# Altium PCB Slave_brd.PcbDoc
Units mil, origin at the board's own origin, x right, y up, seen from the top; angles counter-clockwise.
Board outline 6000 x 4000 mil, 2 copper layers (Top Layer, Bottom Layer); 83 components, 64 nets, 280 pads, 0 vias.
Unrouted connection lines stored in the file: 183.
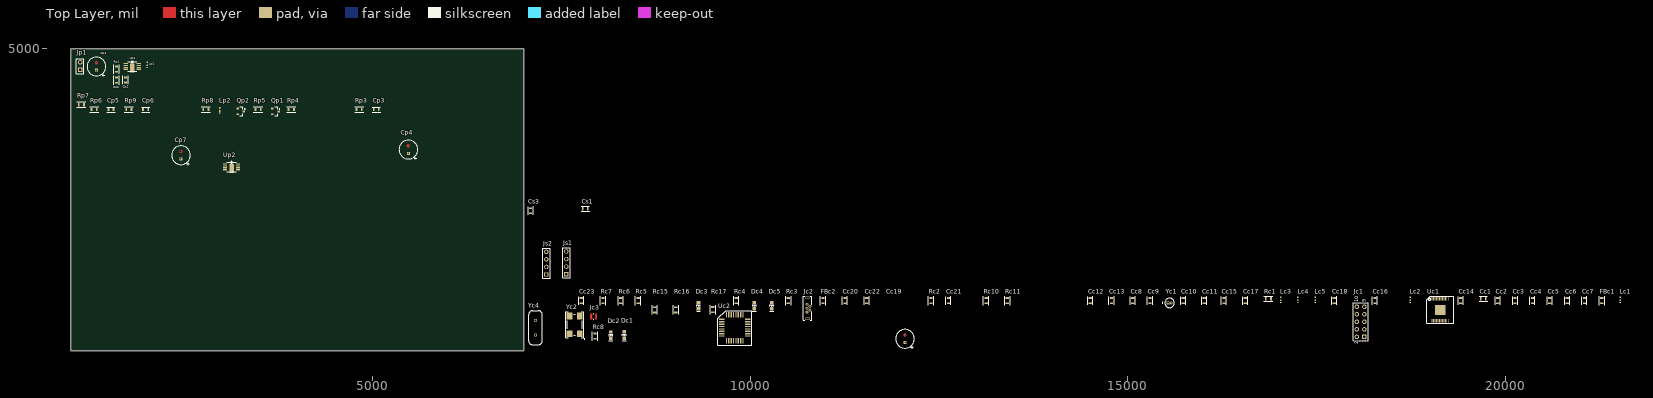
[diagram p0: Top Layer view]
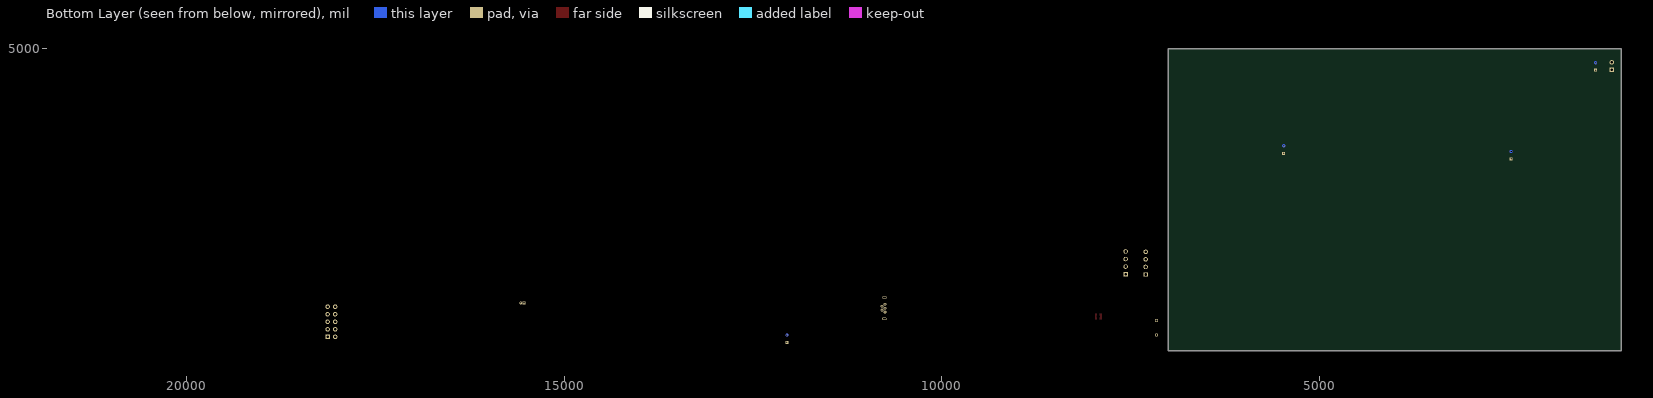
[diagram p1: Bottom Layer view, seen from below]

## Layer stack, top to bottom
Top Solder: solder mask 0.4, Solder Resist, Dk 3.5
Top Layer: signal copper 1.4
Dielectric 1: dielectric 12.6, FR-4, Dk 4.8
Bottom Layer: signal copper 1.4
Bottom Solder: solder mask 0.4, Solder Resist, Dk 3.5

## Board outline
1000,1000 7000,1000 7000,5000 1000,5000
cut-out: 1030,5010

## Design rules (kind name [scope] priority, off if disabled: settings)
Clearance [All] p1: gap=10 ignorepadtopadclearanceinfootprint=FALSE except(0: Arc-Hole Track-Hole SMDPad-Hole THPad-Hole Via-Hole Fill-Hole Poly-Hole Region-Hole Text-Hole)
PolygonConnect [All] p1: connectstyle=Relief reliefconductorwidth=10 reliefentries=4 polygonreliefangle="90 Angle" airgapwidth=10
RoomDefinition Sns [InComponentClass('Sns')] p1: confinementstyle=ConfineIn formatcopy=TRUE lockcomponents=FALSE outline 7045,2745 9510,2745 9510,3025 7045,3025
RoomDefinition Pwr [InComponentClass('Pwr')] p2: confinementstyle=ConfineIn formatcopy=TRUE lockcomponents=FALSE outline 1006.54,3284.69 3346.54,3284.69 3346.54,5000 1006.54,5000
RoomDefinition Controls [InComponentClass('Controls')] p3: confinementstyle=ConfineIn formatcopy=TRUE lockcomponents=FALSE outline 7045,1048.66 21675,1048.66 21675,1833.66 7045,1833.66
RoutingVias [All] p1: holewidth=28 width=50 viastyle="Through Hole" minholewidth=28 minwidth=50 maxholewidth=28 maxwidth=50
SolderMaskExpansion [All] p1: expansion=4
Width [All] p1: maxlimit=10 minlimit=10 preferedwidth=10
30 further rules are at their usual default settings.

## Classes and differential pairs
component class Sns: Cs1 Cs3 Js1 Js2 Us1 Us2 Us3 Us4
component class Pwr: Cp1 Cp2 Cp3 Cp4 Cp5 Cp6 Cp7 Jp1 Lp1 Lp2 Qp1 Qp2 Rp1 Rp2 Rp3 Rp4 Rp5 Rp6 Rp7 Rp8 Rp9 Up1 Up2
component class Controls: Cc1 Cc2 Cc3 Cc4 Cc5 Cc6 Cc7 Cc8 Cc9 Cc10 Cc11 Cc12 Cc13 Cc14 Cc15 Cc16 Cc17 Cc18 Cc19 Cc20 Cc21 Cc22 Cc23 Dc1 Dc2 Dc3 Dc4 Dc5 FBc1 FBc2 Jc1 Jc2 Jc3 Lc1 Lc2 Lc3 Lc4 Lc5 Rc1 Rc2 Rc3 Rc4 Rc5 Rc6 Rc7 Rc8 Rc10 Rc11 Rc15 Rc16 Rc17 Uc1 Uc2 Yc1 Yc2 Yc4

## Components (designator, comment, footprint, x,y, rotation, side; value= is the part's Value field where it differs from the comment)
Cc1 "Cap" c0603 19710,1688.66 r0 top value=DNM
Cc2 "Cap" c0603 19900,1663.66 r90 top value=100nF
Cc3 "Cap" c0603 20130,1663.66 r90 top value=100nF
Cc4 "Cap" c0603 20360,1663.66 r90 top value=100nF
Cc5 "Cap" c0603 20590,1663.66 r90 top value=10uF
Cc6 "Cap" c0603 20820,1663.66 r90 top value=100nF
Cc7 "Cap" c0603 21050,1663.66 r90 top value=100nF
Cc8 "Cap" c0603 15065,1663.66 r90 top value=100nF
Cc9 "Cap" c0603 15295,1663.66 r90 top value=27pF
Cc10 "Cap" c0603 15735,1663.66 r90 top value=27pF
Cc11 "Cap" c0603 16015,1663.66 r90 top value=1uF
Cc12 "Cap" c0603 14505,1663.66 r90 top value=DNM
Cc13 "Cap" c0603 14785,1663.66 r90 top value=DNM
Cc14 "Cap" c0603 19410,1663.66 r90 top value=6p8F
Cc15 "Cap" c0603 16275,1663.66 r90 top value=1pF
Cc16 "Cap" c0603 18275,1663.66 r90 top value=1pF
Cc17 "Cap" c0603 16555,1663.66 r90 top value=1pF
Cc18 "Cap" c0603 17735,1663.66 r90 top value=12pF
Cc19 "Cap" CAP_EL__TH_rad_r3_15h11_2 12050,1158.66 r90 top value=47uF
Cc20 "Cap" c0603 11255,1663.66 r90 top value=100nF
Cc21 "Cap" c0603 12625,1663.66 r90 top value=27pF
Cc22 "Cap" c0603 11545,1663.66 r90 top value=27pF
Cc23 "Cap" c0603 7760,1663.66 r90 top value=33nF
Cp1 "Cap Pol1" CAP_EL__TH_rad_r3_15h11_2 1340,4765 r90 top value=47uF
Cp2 "Cap" c0603 1725,4586.54 r270 top value=100nF
Cp3 "Cap" c0603 5046.54,4195 r0 top value=100nF
Cp4 "Cap Pol1" CAP_EL__TH_rad_r3_15h11_2 5471.54,3665 r90 top value=47uF
Cp5 "Cap" c0603 1531.54,4195 r0 top value=100nF
Cp6 "Cap" c0603 1991.54,4195 r0 top value=100nF
Cp7 "Cap Pol1" CAP_EL__TH_rad_r3_15h11_2 2460,3590 r90 top value=47uF
Cs1 "Cap" c0603 7815,2880 r0 top value=100nF
Cs3 "Cap" c0603 7090,2855 r90 top value=100nF
Dc1 "LED0" LED_0805 8330,1208.66 r90 top
Dc2 "LED0" LED_0805 8155,1207.32 r90 top
Dc3 "LED0" LED_0805 9315,1598.66 r90 top
Dc4 "LED0" LED_0805 10055,1598.66 r90 top
Dc5 "LED0" LED_0805 10285,1598.66 r90 top
FBc1 "BLM18HE152SN1" r0603 21280,1663.66 r90 top
FBc2 "BLM18HE152SN1" r0603 10965,1663.66 r90 top
Jc1 "Header 5X2" HDR2X5 18135,1183.66 r90 top
Jc2 "614105150721" 614105150721 10760,1563.66 r90 top
Jc3 "MM5829-2700RJ4" ANT_MM5829-2700RJ4 7925,1453.66 r0 top
Jp1 "Battery" HDR1X2 1125,4720 r90 top
Js1 "101020088" HDR1X4 7565,2015 r90 top
Js2 "SPX-15074" HDR1X4 7300,2010 r90 top
Lc1 "Inductor" 0402-A 21525,1688.66 r90 top value=10uH
Lc2 "Inductor" 0402-A 18740,1688.66 r90 top value=2n4H
Lc3 "Inductor" 0402-A 17025,1688.66 r90 top value=2n4H
Lc4 "Inductor" 0402-A 17255,1688.66 r90 top value=2nH
Lc5 "Inductor" 0402-A 17485,1688.66 r90 top value=2nH
Lp1 "Inductor" 0402-A 2010,4800.31 r90 top value=22uH
Lp2 "Inductor" 0402-A 2971.54,4195 r90 top value=22uH
Qp1 "MOSFET-P" SOT23_L 3711.54,4170 r0 top
Qp2 "MOSFET-N" SOT23_L 3251.54,4170 r0 top
Rc1 "Res1" r0603 16865,1688.66 r0 top value=100K
Rc2 "Res1" r0603 12395,1663.66 r90 top value=470
Rc3 "Res1" r0603 10505,1663.66 r90 top value=27
Rc4 "Res1" r0603 9815,1663.66 r90 top value=27
Rc5 "Res1" r0603 8515,1663.66 r90 top value=4K7
Rc6 "Res1" r0603 8285,1663.66 r90 top value=10K
Rc7 "Res1" r0603 8050,1663.66 r90 top value=1K5
Rc8 "Res1" r0603 7945,1193.66 r90 top value=2K2
Rc10 "Res1" r0603 13125,1663.66 r90 top value=10K
Rc11 "Res1" r0603 13405,1663.66 r90 top value=10K
Rc15 "Res1" r0603 8735,1543.66 r90 top value=2K2
Rc16 "Res1" r0603 9015,1543.66 r90 top value=2K2
Rc17 "Res1" r0603 9505,1545 r90 top value=2K2
Rp1 "Res1" r0603 1605,4731.54 r90 top value=53K6
Rp2 "Res1" r0603 1605,4586.54 r90 top value=100K
Rp3 "Res1" r0603 4821.54,4195 r0 top value=100K
Rp4 "Res1" r0603 3921.54,4195 r0 top value=100K
Rp5 "Res1" r0603 3481.54,4195 r0 top value=1K
Rp6 "Res1" r0603 1311.54,4195 r0 top value=53K6
Rp7 "Res1" r0603 1142.36,4259.69 r0 top value=100K
Rp8 "Res1" r0603 2791.54,4195 r0 top value=100K
Rp9 "Res1" r0603 1771.54,4195 r0 top value=100K
Uc1 "CC2650F128RGZ" VQFN-48(RGZ) 19005,1648.66 r0 top
Uc2 "FT232BL-REEL" LQFP-32 9794.88,1305 r0 top
Up1 "MAX1674/5" MSOP-8_TermalPad 1815,4765 r0 top
Up2 "MAX1674/5" MSOP-8_TermalPad 3130,3435 r0 top
Yc1 "32.768 kHz" XTAL_AB38T-32.768KHZ_TH_vertical 15555,1633.66 r0 top
Yc2 "ECS-240-18-20BQ-DS" XTAL_7x5_4pads 7675,1343.66 r90 top
Yc4 "ABL-6.000MHZ-B2" XTAL_TH_2pad_HC49/US 7155,1305 r90 top

## Footprints (in the part's own frame and the unit in brackets; to place one, negate y for a bottom-side part, rotate by r counter-clockwise, add the part's x,y. Pads: shape width x height; smd on the part's side, far side on the other; paste and mask are expansions set on the pad)
0402-A [mm] "Chip Inductor, Body 1.0x0.5mm, IPC High Density"
  rect 0.6x0.5 smd: 1(-0.5,0) 2(0.5,0)
  silkscreen extent -1.1,-0.15 -1.1,0.15, body extent -0.55,-0.3 0.55,0.3, height 0.55
614105150721 [mm] "Micro USB 2.0 Type B Vertical 5 Contacts"
  round 0.94 hole 0.44: 1(-1.3,0.22) 2(-0.65,-0.78) 3(0,0.22) 4(0.65,-0.78) 5(1.3,0.22)
  oval 0.85x1.5 hole 0.35 slot 1 at 90 deg: Shell(-3.575,0) Shell(3.575,0)
  silkscreen extent -4,-1.4 4,1.5, body extent -4,-1.4 4,1.5, height 5.64
ANT_MM5829-2700RJ4 [mm]
  rect 0.4x0.5 smd: 1(0,-0.95) 3(0,0.95)
  rect 0.1x0.1 smd: 2(0.775,0) 4(-0.775,0)
  Top Layer region: -0.5,0.5 -0.5,0.85 -1.1,0.85 -1.1,-0.85 -0.5,-0.85 -0.5,-0.5 -0.7,-0.15 -0.7,0.15
  Top Layer region: 0.5,-0.5 0.5,-0.85 1.1,-0.85 1.1,0.85 0.5,0.85 0.5,0.5 0.7,0.15 0.7,-0.15
  body extent -0.9,-1 0.9,1, height 0.5
c0603 [mm] "Capacitor 0603"
  rect 0.6x1.1 smd: 1(-0.85,0) 2(0.85,0)
  silkscreen extent -1.37,-0.84 1.43,0.84, body extent -0.8,-0.4 0.91,0.4, height 0.8
CAP_EL__TH_rad_r3_15h11_2 [mm] "Condensatori elettrolitici in alluminio, Foro passante, r 3.15mm h 11.2mm"
  rect 1.008x1.008 hole 0.5: 1(-1.25,0)
  round 0.5 hole 0.5: 2(1.25,0)
  Top Layer region: 1.724,0.172 1.463,0.457 1.078,0.474 0.793,0.213 0.776,-0.172 1.037,-0.457 1.422,-0.474 1.707,-0.213
  Bottom Layer region: 1.724,0.172 1.463,0.457 1.078,0.474 0.793,0.213 0.776,-0.172 1.037,-0.457 1.422,-0.474 1.707,-0.213
  Multi-Layer region: 1.724,0.172 1.463,0.457 1.078,0.474 0.793,0.213 0.776,-0.172 1.037,-0.457 1.422,-0.474 1.707,-0.213
  silkscreen extent -3.3,-3.15 3.15,3.15, body extent -3.16,-3.22 3.17,3.14, height 11.21
HDR1X2 [mm] "Connector; Header; 2 Position"
  rect 1.5x1.5 hole 0.9: 1(0,0)
  round 1.5 hole 0.9: 2(2.54,0)
  silkscreen extent -1.27,-1.27 3.81,1.27
HDR1X4 [mm] "Connector; Header; 4 Position"
  rect 1.5x1.5 hole 0.9: 1(0,0)
  round 1.5 hole 0.9: 2(2.54,0) 3(5.08,0) 4(7.62,0)
  silkscreen extent -1.27,-1.27 8.89,1.27
HDR2X5 [mm] "Connector; Header; 5x2 Position"
  rect 1.5x1.5 hole 0.9: 1(0,0)
  round 1.5 hole 0.9: 2(0,2.54) 3(2.54,0) 4(2.54,2.54) 5(5.08,0) 6(5.08,2.54) 7(7.62,0) 8(7.62,2.54) 9(10.16,0) 10(10.16,2.54)
  silkscreen extent -1.27,-1.27 11.43,3.81
LED_0805 [mm] "Diode Led 0803"
  rect 1.1x1.2 smd: 1(-1.05,0) 2(1.05,0)
  silkscreen extent -1.9,-0.66 0.32,0.68, body extent -1,-0.62 1,0.63, height 0.64
LQFP-32 [mil] "LQFP-32, no central pad, easy solderable"
  rect 73.74x18 smd: 1(-169.88,110) 2(-169.88,79) 3(-169.88,47) 4(-169.88,16) 5(-169.88,-16) 6(-169.88,-47) 7(-169.88,-79) 8(-169.88,-110) 17(169.88,-110) 18(169.88,-79) 19(169.88,-47) 20(169.88,-16) 21(169.88,16) 22(169.88,47) 23(169.88,79) 24(169.88,110)
  rect 18x73.74 smd: 9(-110,-169.88) 10(-79,-169.88) 11(-47,-169.88) 12(-16,-169.88) 13(16,-169.88) 14(47,-169.88) 15(79,-169.88) 16(110,-169.88) 25(110,169.88) 26(79,169.88) 27(47,169.88) 28(16,169.88) 29(-16,169.88) 30(-47,169.88) 31(-79,169.88) 32(-110,169.88)
  silkscreen extent -224,-231 224,224, body extent -177,-177 177,177, height 64
MSOP-8_TermalPad [mil]
  rect 56x17 smd: 1(-86,38.58) 2(-86,13) 3(-86,-12.5) 4(-86,-38) 5(86,-38) 6(86,-12.5) 7(86,13) 8(86,38.58)
  rect 59.06x118.11 smd: ""(0,-19.69)
  silkscreen extent -61,-61 61,73, body extent -98,-61 97,61, height 43
r0603 [mm] "Resistor 0603"
  rect 0.6x1.1 smd: 1(-0.91,0) 2(0.85,0)
  silkscreen extent -1.56,-0.91 1.5,0.91, body extent -0.8,-0.4 0.8,0.4, height 0.45
SOT23_L [mm] "SOT23, 3-Leads, Body 2.9x1.3mm, Pitch 0.95mm, Lead Span 2.3mm - Reverse Pinning, IPC High Density"
  rect 0.85x0.6 smd: 1(1.075,0) 2(-1.075,-0.95) 3(-1.075,0.95)
  silkscreen extent -0.3,-1.5 1.48,1.5, body extent -0.7,-1.5 0.7,1.5, height 1.1
VQFN-48(RGZ) [mm]
  rect 1.2x0.15 smd: 1(-0.3,0) 2(-0.3,-0.5) 3(-0.3,-1) 4(-0.3,-1.5) 5(-0.3,-2) 6(-0.3,-2.5) 7(-0.3,-3) 8(-0.3,-3.5) 9(-0.3,-4) 10(-0.3,-4.5) 11(-0.3,-5) 12(-0.3,-5.5) 25(7.1,-5.5) 26(7.1,-5) 27(7.1,-4.5) 28(7.1,-4) 29(7.1,-3.5) 30(7.1,-3) 31(7.1,-2.5) 32(7.1,-2) 33(7.1,-1.5) 34(7.1,-1) 35(7.1,-0.5) 36(7.1,0)
  rect 0.15x1.2 smd: 13(0.65,-6.45) 14(1.15,-6.45) 15(1.65,-6.45) 16(2.15,-6.45) 17(2.65,-6.45) 18(3.15,-6.45) 19(3.65,-6.45) 20(4.15,-6.45) 21(4.65,-6.45) 22(5.15,-6.45) 23(5.65,-6.45) 24(6.15,-6.45) 37(6.15,0.95) 38(5.65,0.95) 39(5.15,0.95) 40(4.65,0.95) 41(4.15,0.95) 42(3.65,0.95) 43(3.15,0.95) 44(2.65,0.95) 45(2.15,0.95) 46(1.65,0.95) 47(1.15,0.95) 48(0.65,0.95)
  rect 3.5x3.5 smd: 49(3.4,-2.75)
  silkscreen extent -1.17,-7.28 8,1.89, body extent -0.12,-6.23 6.88,0.77, height 1
XTAL_7x5_4pads [mm] "The CSM-8M is a miniature SMD Crystal with a 7.0 x 5.0 mm footprint."
  rect 2.3x2 smd: 1(-3,-1.7) 2(3,-1.7) 3(3,1.7) 4(-3,1.7)
  silkscreen extent -4.94,-3.46 4.36,2.96, body extent -3.5,-2.48 3.5,2.52, height 1.51
XTAL_AB38T-32.768KHZ_TH_vertical [mm] "CRYSTAL TH vertical  32.7680KHZ 12.5PF"
  rect 0.925x0.925 hole 0.55: 1(-0.55,0)
  round 0.925 hole 0.55: 2(0.55,0)
  silkscreen extent -2.54,-1.6 1.6,1.6, body extent -1.74,-1.6 1.71,1.6, height 8.27
XTAL_TH_2pad_HC49/US [mm] "Crystal 11,50 x 5,00mm TH 2 pads,"
  round 1.03 hole 0.63: 1(-2.44,0) 2(2.44,0)
  silkscreen extent -5.68,-2.33 5.68,2.33, body extent -5.74,-2.5 5.76,2.5, height 3.5

## Part data
Cc1 Cc2 Cc3 Cc4 Cc5 Cc6 Cc7 Cc8 Cc9 Cc10 Cc11 Cc12 Cc13 Cc14 Cc15 Cc16 Cc17 Cc18 Cc19 Cc20 Cc21 Cc22 Cc23 Cp2 Cp3 Cp5 Cp6 Cs1 Cs3: "Capacitor", LatestRevisionDate=17-Jul-2002, LatestRevisionNote="Re-released for DXP Platform.", PackageDescription="Radial Cap, Thru-Hole; 2 Leads; 0.3 in Pin Spacing", PackageReference=RAD-0.3, Published=8-Jun-2000, Publisher="Altium Limited"
Cp1 Cp4 Cp7: "Polarized Capacitor (Radial)", LatestRevisionDate=17-Jul-2002, LatestRevisionNote="Re-released for DXP Platform.", PackageDescription="Polarized Capacitor (Radial); 2 Leads", PackageReference=RB7.6-15, Published=8-Jun-2000, Publisher="Altium Limited"
Dc1 Dc2 Dc3 Dc4 Dc5: "Typical INFRARED GaAs LED", LatestRevisionDate=08-Jul-2005, LatestRevisionNote="Mech Layer 1 removed.", PackageDescription="LED; 2 Leads", PackageReference=LED-0, Published=8-Jun-2000, Publisher="Altium Limited"
FBc1 FBc2: library part "Fuse 1", "Fuse", LatestRevisionDate=17-Jul-2002, LatestRevisionNote="Re-released for DXP Platform.", PackageDescription="Thru-Hole; 2 Leads", PackageReference=PIN-W2/E2.8, Published=8-Jun-2000, Publisher="Altium Limited"
Jc1: "Header, 5-Pin, Dual row", LatestRevisionDate=17-Jul-2002, LatestRevisionNote="Re-released for DXP Platform.", Publisher="Altium Limited"
Jc2: "Micro USB 2.0 Type B Receptacle WR-COM, Vertical, THT", Contact Resistance="30 mOhm", Operating Temperature="-40 to 85 degC", Rated Current="1.8 A", Working Voltage="30 VAC", ComponentLink1Description=Manufacturer, ComponentLink1URL=http://www.we-online.de, ComponentLink2Description=Datasheet, ComponentLink2URL=https://katalog.we-online.de/em/datasheet/614105150721.pdf, Connector Type="Micro USB 2.0 Type B", Gender=Receptacle, Mounting Technology=THT, Orientation=Vertical, Packaging="Tape and Reel", Part Number=614105150721, Published Date="September 2018", Publisher="Wurth Elektronik"
Jc3: "Conn Coaxial RCP 0Hz to 12GHz 50Ohm Solder ST SMD Gold", Package=None, Digi-Key_Part_Number=490-5894-1-ND, Digi-Key_Purchase_URL=https://www.digikey.it/product-detail/en/murata-electronics-north-america/MM5829-2700RJ4/490-5894-1-ND/3528184?utm_source=snapeda&utm_medium=aggregator&utm_campaign=symbol, MF=Murata, MP=MM5829-2700RJ4, SnapEDA_Link=https://www.snapeda.com/parts/MM5829-2700RJ4/Murata%20Electronics%20North%20America/view-part/?ref=snap
Jp1: library part "Header 2", "Header, 2-Pin", LatestRevisionDate=17-Jul-2002, LatestRevisionNote="Re-released for DXP Platform.", Publisher="Altium Limited"
Js1: library part "Header 4", "Header, 4-Pin", LatestRevisionDate=17-Jul-2002, LatestRevisionNote="Re-released for DXP Platform.", Publisher="Altium Limited"
Js2: library part SHTC3, "Humidity and Temperature Sensor IC: - Ultra-low power consumption / - Full battery supply voltage range (1.62 - 3.6 V) / - Small DFN package: 2 × 2 × 0.75 mm3 / - Typical accuracy: ±2 %RH and ±0.2 °C / - Fully calibrated and reflow solderable / - Power-up and measurement within 1 ms", ComponentLink1Description=datasheet, ComponentLink1URL=https://www.sensirion.com/fileadmin/user_upload/customers/sensirion/Dokumente/0_Datasheets/Humidity/Sensirion_Humidity_Sensors_SHTC3_Datasheet.pdf
Qp1: "P-Channel MOSFET", LatestRevisionDate=17-Jul-2002, LatestRevisionNote="Re-released for DXP Platform.", PackageDescription="TO, Flat Index; 3 In-Line, Axial Leads; Body Dia. 4.6mm; Lead Dia. 0.5 mm (max)", PackageReference=E3, PackageVersion=1995/1996, Published=8-Jun-2000, Publisher="Altium Limited"
Qp2: "N-Channel MOSFET", LatestRevisionDate=17-Jul-2002, LatestRevisionNote="Re-released for DXP Platform.", PackageDescription="TO, Flat Index; 3 In-Line, Axial Leads; Body Dia. 4.6mm; Lead Dia. 0.5 mm (max)", PackageReference=E3, PackageVersion=1995/1996, Published=8-Jun-2000, Publisher="Altium Limited"
Rc1 Rc2 Rc3 Rc4 Rc5 Rc6 Rc7 Rc8 Rc10 Rc11 Rc15 Rc16 Rc17 Rp1 Rp2 Rp3 Rp4 Rp5 Rp6 Rp7 Rp8 Rp9: "Resistor", LatestRevisionDate=17-Jul-2002, LatestRevisionNote="Re-released for DXP Platform.", PackageDescription="Axial Device, Thru-Hole; 2 Leads; 0.3 in Pin Spacing", PackageReference=AXIAL-0.3, Published=8-Jun-2000, Publisher="Altium Limited"
Uc1: "The CC2650 device is a wireless MCU targeting Bluetooth, ZigBee® and 6LoWPAN, and ZigBee RF4CE / remote control applications.", ComponentLink1Description=Datasheet, ComponentLink1URL=http://www.ti.com/product/CC2650
Uc2: library part FT232B, "The FT232B is a USB to serial UART / interface", ComponentLink1Description=Datasheet, ComponentLink1URL=http://www.farnell.com/datasheets/1803231.pdf?_ga=2.42688038.2091339076.1550949916-1549779019.1547751625
Up1 Up2: "High-Efficiency, Low-Supply-Current, / Compact, Step-Up DC-DC Converters", ComponentLink1Description=Datasheet, ComponentLink1URL=https://datasheets.maximintegrated.com/en/ds/MAX1674-MAX1676.pdf
Yc1 Yc4: library part XTAL, "Crystal Oscillator", LatestRevisionDate=17-Jul-2002, LatestRevisionNote="Re-released for DXP Platform.", PackageDescription="Crystal, Thru-Hole; 2 Leads; Body 3.1 x 8.2 mm (Dia.xH)", PackageReference=R38, Published=8-Jun-2000, Publisher="Altium Limited"
Yc2: library part XTAL_4p, "MHz Range Crystal Unit Miniature Size Low Profile SMD"
Lc1 Lc2 Lc3 Lc4 Lc5 Lp1 Lp2: Code_IEC=1005, Code_JEITA=0402, LatestRevisionDate=29-May-2009, LatestRevisionNote="IPC-7351 Footprint Added.", PackageDescription="Chip Inductor", PackageReference=0402-A, Published=8-Jun-2000, Publisher="Altium Limited"

## Nets (pads, with @x,y where several pads share a name; then routed paths per layer and width w, separated by ;. In a path a pad name is that pad's centre, name@x,y a point inside that pad or via, vN(x,y) a via of type N, cw(c..) or ccw(c..) an arc to the next point about the centre after c; other vN are vias at no path point)
5V0: Cp6.2 Cp7.1 Qp1.3 Rp4.2 Rp9.2 Up2.8
FT3V3: Cc23.1 Uc2.6 Uc2.13 Uc2.14
GND: Cc1.1 Cc2.1 Cc3.1 Cc4.1 Cc5.1 Cc6.1 Cc7.1 Cc8.1 Cc9.1 Cc10.2 Cc11.2 Cc12.1 Cc13.2 Cc14.2 Cc15.1 Cc17.1 Cc19.1 Cc20.2 Cc21.1 Cc22.2 Cc23.2 Cp1.2 Cp2.2 Cp3.2 Cp4.2 Cp5.2 Cp6.1 Cp7.2 Cs1.2 Cs3.2 Jc1.3 Jc1.5 Jc1.9 Jc2.5 Jc2.Shell Jc3.2 Jc3.3 Jc3.4 Jp1.2 Js1.1 Js2.4 Qp2.3 Rc6.2 Rc15.1 Rc16.1 Rc17.1 Rp2.1 Rp7.1 Rp8.1 Uc1.49 Uc2.9 Uc2.17 Uc2.29 Up1.6 Up2.1 Up2.6 Yc2.2 Yc2.4
NetCc8_2: Cc8.2 Jc1.10 Rc1.1 Uc1.35
NetCc9_2: Cc9.2 Uc1.3 Yc1.1
NetCc10_1: Cc10.1 Uc1.4 Yc1.2
NetCc11_1: Cc11.1 Uc1.23
NetCc12_2: Cc12.2 Uc1.47 Yc2.1
NetCc13_1: Cc13.1 Uc1.46 Yc2.3
NetCc14_1: Cc14.1 Lc2.2
NetCc15_2: Cc15.2 Lc3.1 Uc1.2
NetCc16_1: Cc16.1 Lc2.1 Uc1.1
NetCc16_2: Cc16.2 Lc3.2 Lc4.1
NetCc17_2: Cc17.2 Lc4.2 Lc5.1
NetCc18_1: Cc18.1 Jc3.1
NetCc18_2: Cc18.2 Lc5.2
NetCc20_1: Cc20.1 Rc2.1 Uc2.30
NetCc21_2: Cc21.2 Uc2.28 Yc4.1
NetCc22_1: Cc22.1 Uc2.27 Yc4.2
NetCp1_1: Cp1.1 Jp1.1 Lp1.2 Lp2.2 Rp1.2 Rp6.2
NetCp2_1: Cp2.1 Up1.4
NetCp5_1: Cp5.1 Up2.4
NetDc1_1: Dc1.1 Dc2.1 Rc8.1
NetDc1_2: Dc1.2 Uc2.11
NetDc2_2: Dc2.2 Uc2.12
NetDc3_1: Dc3.1 Uc1.30
NetDc3_2: Dc3.2 Rc15.2
NetDc4_1: Dc4.1 Uc1.29
NetDc4_2: Dc4.2 Rc16.2
NetDc5_1: Dc5.1 Uc1.28
NetDc5_2: Dc5.2 Rc17.2
NetFBc2_1: FBc2.1 Jc2.1
NetJc1_2: Jc1.2 Uc1.24
NetJc1_4: Jc1.4 Uc1.25
NetJc1_6: Jc1.6 Uc1.26
NetJc1_8: Jc1.8 Uc1.27
NetJc2_2: Jc2.2 Rc3.1
NetJc2_3: Jc2.3 Rc4.1
NetJs1_3: Js1.3 Js2.3 Rc11.1 Uc1.6
NetJs1_4: Js1.4 Js2.2 Rc10.1 Uc1.5
NetLc1_1: Lc1.1 Uc1.33
NetLp1_1: Lp1.1 Up1.7
NetLp2_1: Lp2.1 Up2.7
NetQp1_1: Qp1.1 Rp8.2 Up2.5
NetQp1_2: Qp1.2 Qp2.1
NetQp2_2: Qp2.2 Rp5.2
NetRc3_2: Rc3.2 Uc2.8
NetRc4_2: Rc4.2 Rc7.2 Uc2.7
NetRc5_1: Rc5.1 Rc6.1 Uc2.4
NetRc7_1: Rc7.1 Uc2.5
NetRp1_1: Rp1.1 Rp2.2 Up1.2
NetRp3_1: Rp3.1 Uc1.18 Up1.3
NetRp5_1: Rp5.1 Uc1.32
NetRp6_1: Rp6.1 Rp7.2 Up2.2
NetRp9_1: Rp9.1 Uc1.19 Up2.3
NetUc1_12: Uc1.12 Uc2.24
NetUc1_14: Uc1.14 Uc2.25
NetUc1_15: Uc1.15 Uc2.23
NetUc1_16: Uc1.16 Uc2.22
USB5V0: Cc19.2 FBc2.2 Rc2.2 Rc5.2 Rc8.2 Uc2.3 Uc2.26
VCC: Cp3.1 Cp4.1 Cs1.1 Cs3.1 FBc1.2 Jc1.1 Js1.2 Js2.1 Rc1.2 Rc10.2 Rc11.2 Rp3.2 Up1.1 Up1.5 Up1.8
VCCR: Uc1.45 Uc1.48
VDDR: Cc5.2 Cc6.2 Cc7.2 Lc1.2
VDDS: Cc1.2 Cc2.2 Cc3.2 Cc4.2 FBc1.1 Uc1.13 Uc1.22 Uc1.34 Uc1.44
pads on no net: Jc1.7 Jc2.4 Rp4.1 Uc1.7 Uc1.8 Uc1.9 Uc1.10 Uc1.11 Uc1.17 Uc1.20 Uc1.21 Uc1.31 Uc1.36 Uc1.37 Uc1.38 Uc1.39 Uc1.40 Uc1.41 Uc1.42 Uc1.43 Uc2.1 Uc2.2 Uc2.10 Uc2.15 Uc2.16 Uc2.18 Uc2.19 Uc2.20 Uc2.21 Uc2.31 Uc2.32 Up1. Up2.

## Polygon pours and split planes (outlines as drawn)
no net on Top Layer (solid, pour order 4): 3322.64,-240
no net on Top Layer (solid, pour order 2): 2648.07,4320

## Text inside footprints (layer, text, board x,y; h text height)
Jc1: Top Overlay "10" at 18055,1643.66 h50 r90; Top Overlay "9" at 18155,1643.66 h50 r90; Top Overlay "1" at 18155,1103.66 h50 r90; Top Overlay "2" at 18055,1083.66 h50 r90